# Altium PCB Fly Swatter.PcbDoc
Units mil, origin at the board's own origin, x right, y up, seen from the top; angles counter-clockwise.
Board outline 6000 x 4000 mil, 2 copper layers (Top Layer, Bottom Layer); 17 components, 10 nets, 36 pads, 0 vias.
Unrouted connection lines stored in the file: 26.
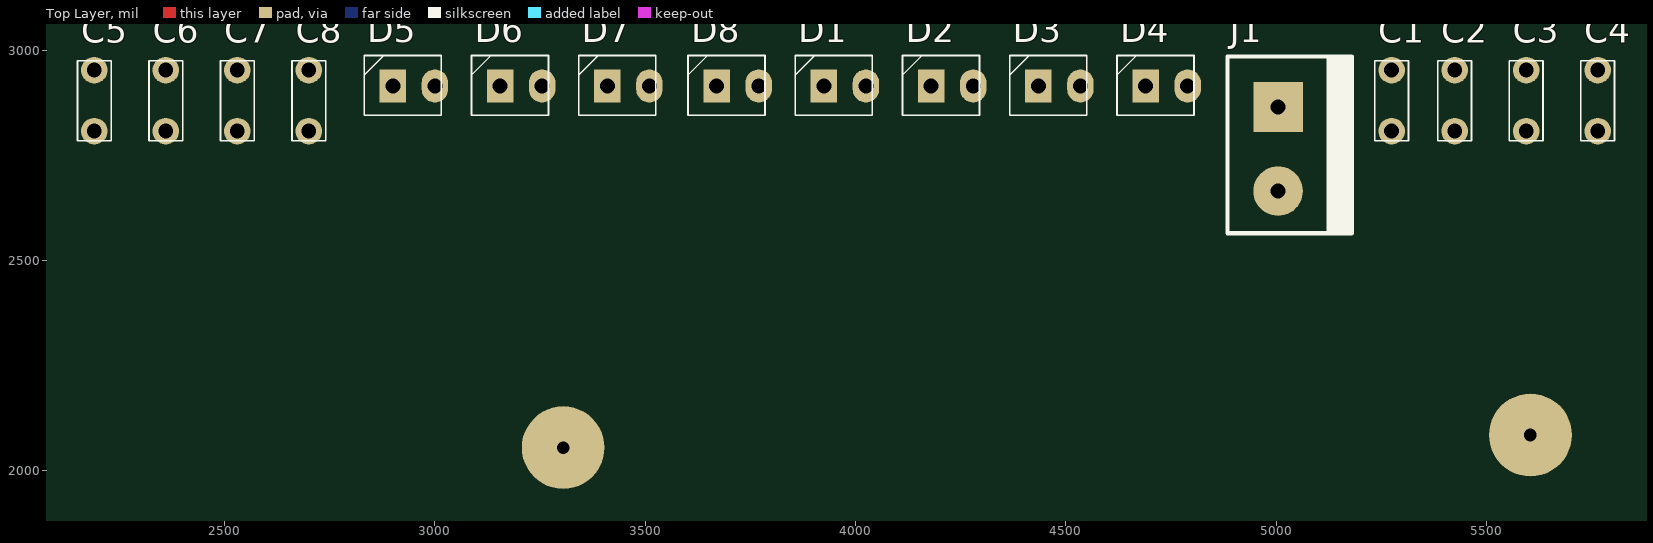
[diagram p0: Top Layer view]
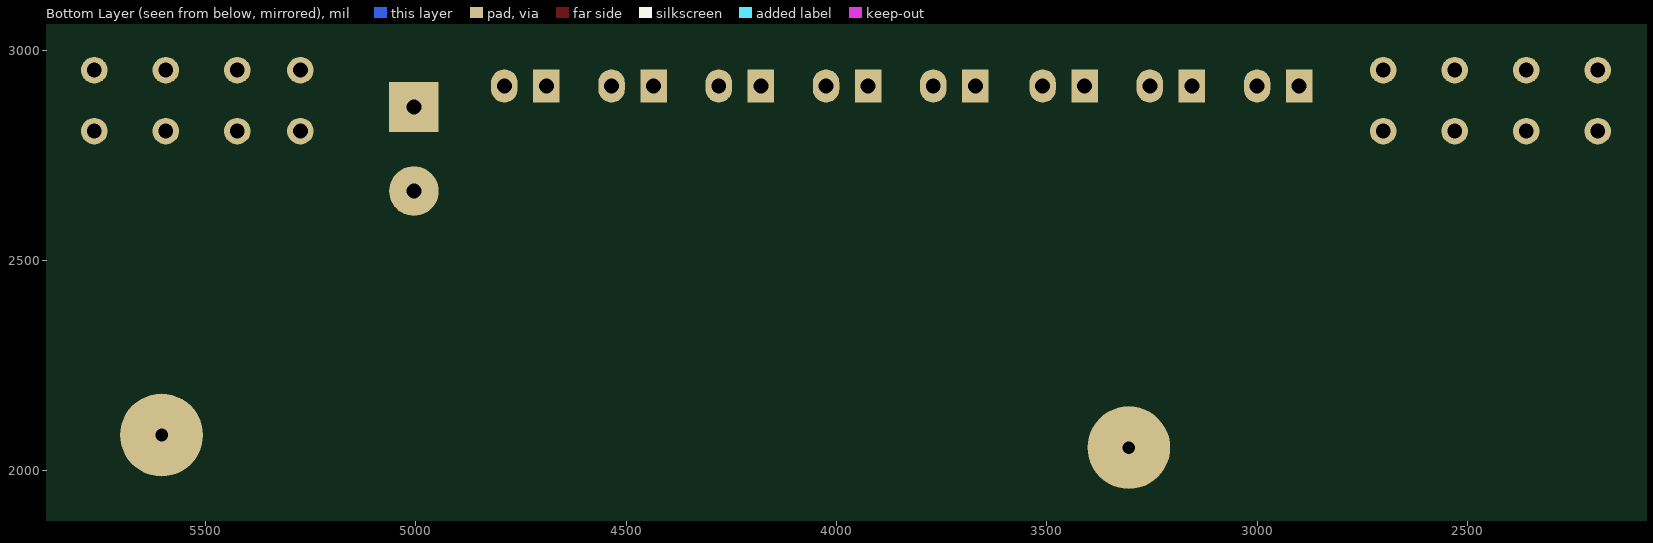
[diagram p1: Bottom Layer view, seen from below]

## Layer stack, top to bottom
Top Solder: solder mask 0.4, Solder Resist, Dk 3.5
Top Layer: signal copper 1.4
Dielectric 1: dielectric 12.6, FR-4, Dk 4.8
Bottom Layer: signal copper 1.4
Bottom Solder: solder mask 0.4, Solder Resist, Dk 3.5

## Board outline
1000,1000 7000,1000 7000,5000 1000,5000

## Design rules (kind name [scope] priority, off if disabled: settings)
Clearance [All] p1: gap=10 ignorepadtopadclearanceinfootprint=FALSE except(0: Arc-Hole Track-Hole SMDPad-Hole THPad-Hole Via-Hole Fill-Hole Poly-Hole Region-Hole Text-Hole)
PolygonConnect [All] p1: connectstyle=Relief reliefconductorwidth=10 reliefentries=4 polygonreliefangle="90 Angle" airgapwidth=10
RoutingVias [All] p1: holewidth=28 width=50 viastyle="Through Hole" minholewidth=28 minwidth=50 maxholewidth=28 maxwidth=50
SolderMaskExpansion [All] p1: expansion=4 istentingtop=FALSE
Width [All] p1: maxlimit=10 minlimit=10 preferedwidth=10
30 further rules are at their usual default settings.

## Components (designator, comment, footprint, x,y, rotation, side; value= is the part's Value field where it differs from the comment)
C1 "0.1uF 630V" "Cap Ceramic 104" 5275,2880 r90 top
C2 "0.1uF 630V" "Cap Ceramic 104" 5425,2880 r90 top
C3 "0.1uF 630V" "Cap Ceramic 104" 5595,2880 r90 top
C4 "0.1uF 630V" "Cap Ceramic 104" 5765,2880 r90 top
C5 "0.1uF 630V" "Cap Ceramic 104" 2190,2880 r90 top
C6 "0.1uF 630V" "Cap Ceramic 104" 2360,2880 r90 top
C7 "0.1uF 630V" "Cap Ceramic 104" 2530,2880 r90 top
C8 "0.1uF 630V" "Cap Ceramic 104" 2700,2880 r90 top
D1 "1N4007" "Diode 2.54mm TH V" 3975,2915 r0 top
D2 "1N4007" "Diode 2.54mm TH V" 4230,2915 r0 top
D3 "1N4007" "Diode 2.54mm TH V" 4485,2915 r0 top
D4 "1N4007" "Diode 2.54mm TH V" 4740,2915 r0 top
D5 "1N4007" "Diode 2.54mm TH V" 2950,2915 r0 top
D6 "1N4007" "Diode 2.54mm TH V" 3205,2915 r0 top
D7 "1N4007" "Diode 2.54mm TH V" 3460,2915 r0 top
D8 "1N4007" "Diode 2.54mm TH V" 3720,2915 r0 top
J1 "10 A" "Screw Terminal Block 5.08mm TH Green" 5005,2765 r0 top

## Footprints (in the part's own frame and the unit in brackets; to place one, negate y for a bottom-side part, rotate by r counter-clockwise, add the part's x,y. Pads: shape width x height; smd on the part's side, far side on the other; paste and mask are expansions set on the pad)
"Cap Ceramic 104" [mm]
  round 1.6 hole 0.9: 1(-1.841,0) 2(1.841,0)
  silkscreen extent -2.41,-1.02 2.41,1.02, body extent -2.47,-1.01 2.45,0.99, height 6.89
"Diode 2.54mm TH V" [mm] "2.54mm Vertical"
  rect 1.6x2 hole 0.9: 1(-1.27,0)
  oval 1.6x2 hole 0.9: 2(1.27,0)
  silkscreen extent -3,-1.78 1.65,1.84, body extent -3.05,-1.78 1.7,1.78, height 11.05
"Screw Terminal Block 5.08mm TH Green" [mm]
  round 3 hole 0.9: 1(0,-2.54)
  rect 3x3 hole 0.9: 2(0,2.54)
  silkscreen extent -3.05,-5.08 4.44,5.59, body extent -3.04,-5 4.56,5.6, height 10.01

## Part data
C1 C2 C3 C4 C5 C6 C7 C8: library part Ceramic_Capacitors, "Capacitor Ceramic", Capacitance=100nF, Case/Package=Dipped, Dielectric=X7R, Manufacturer=KEMET, Manufacturer Part Number=C320C104M5R5TA7301, Max Operating Temperature=125°C, Min Operating Temperature=-55°C, Package Quantity=2500, Supplier Part Number 1=399-13978-1-ND, Tolerance=20%, Voltage Rating=50V, Category="Ceramic Capacitors", ComponentLink1Description=https://datasheet.ciiva.com/5396/f3101-goldmax-5396597.pdf?src-supplier=Mouser, ComponentLink1URL=https://datasheet.ciiva.com/5396/f3101-goldmax-5396597.pdf?src-supplier=Mouser, Depth=3.18mm, Dissipation Factor=2.5%, Height=3.18mm, Lead Diameter=0.51mm, Lead Pitch=2.54mm, Lead/Base Style=Straight, Length=6.6mm, Packaging="Tape and Reel", Pricing 1="1=0.24000, 10=0.16200, 50=0.10800, 100=0.09180, 500=0.06480, 1000=0.05670 (USD)", RoHS=Yes, Stock 1=8222, Supplier 1=Digi-Key, Termination=Radial, Width=5.08mm
D1 D2 D3 D4 D5 D6 D7 D8: library part Diodes, "Diodes", Arrow Part Number=1N4007-E3/53, Manufacturer_Name=Vishay, Mouser Part Number=625-1N4007-E3/53, Arrow Price/Stock=https://www.arrow.com/en/products/1n4007-e353/vishay, Datasheet Link=http://www.vishay.com/docs/88503/1n4001.pdf, Manufacturer_Part_Number=1N4007-E3/53, Mouser Price/Stock=https://www.mouser.co.uk/ProductDetail/Vishay-General-Semiconductor/1N4007-E3-53?qs=N4vtoAxH%2FSpFgYSIWmQOdg%3D%3D
J1: library part Terminal_Block_2Pos, "Terminals 2POS", Color=Green, Current=10A, Current Rating=13.5A, Flammability Rating="UL94 V-0", Manufacturer="Phoenix Contact", Manufacturer Part Number=1729128, Max Operating Temperature=100°C, Max Supply Voltage=400V, Min Operating Temperature=-20°C, Package Quantity=50, Supplier Part Number 1=277-1247-ND, Test Voltage=4kV, Voltage=300V, Approvals=UL,CSA, Category="Terminal Blocks", ComponentLink1Description=https://datasheet.ciiva.com/823/1729128-823779.pdf?src-supplier=Digi-Key, ComponentLink1URL=https://datasheet.ciiva.com/823/1729128-823779.pdf?src-supplier=Digi-Key, ComponentLink2Description=https://datasheet.ciiva.com/15169/getdatasheetpartid-199310-15169845.pdf?src-supplier=Verical, ComponentLink2URL=https://datasheet.ciiva.com/15169/getdatasheetpartid-199310-15169845.pdf?src-supplier=Verical, ComponentLink3Description=https://datasheet.ciiva.com/16046/1729128-16046181.pdf?src-supplier=Onlinecomponents.com, ComponentLink3URL=https://datasheet.ciiva.com/16046/1729128-16046181.pdf?src-supplier=Onlinecomponents.com, ComponentLink4Description=https://datasheet.ciiva.com/14607/70054405-14607157.pdf?src-supplier=Allied+Electronics, ComponentLink4URL=https://datasheet.ciiva.com/14607/70054405-14607157.pdf?src-supplier=Allied+Electronics, ComponentLink5Description=https://datasheet.ciiva.com/29218/743664-da-01-en-printklemmenblock-mkdsn-1-5-2-5-08-29218154.pdf?src-supplier=Conrad, ComponentLink5URL=https://datasheet.ciiva.com/29218/743664-da-01-en-printklemmenblock-mkdsn-1-5-2-5-08-29218154.pdf?src-supplier=Conrad, Connector Type=Screw, Contact Material=Tin, Depth=8.1mm, Height=13.5mm, Housing Color=Green, Housing Material=Polyamide, Insulation Material=Nylon, Lead Free="Lead Free", Length=8.1mm, Max Current Rating=13.5A, Mount="Through Hole", Number of Circuits=2, Number of Contacts=2, Number of Levels=1, Number of Pins=2, Number of Poles=2, Number of Positions=2, Number of Positions Per Level=2, Number of Rows=1, Orientation=Straight, Packaging=Bulk, Pitch=5.08mm, Pricing 1="1=1.09000, 10=1.04700, 50=1.00100, 100=0.97370, 250=0.91000, 500=0.83720, 1000=0.77350, 2500=0.73710, 5000=0.69160 (USD)", Radiation Hardening=No, REACH SVHC="No SVHC", RoHS=Yes, Stock 1=9869, Supplier 1=Digi-Key, Termination=Screw, Voltage Rating=400V, Weight=0.069842oz, Width=13.5mm, Wire Gauge (Max)=26AWG, Wire Gauge (Min)=14AWG, Wire/Cable Gauge=26AWG

## Free pads (board coordinates)
  round 196.85 hole 30: 5(5605,2085) 6(3305,2055)

## Nets (pads, with @x,y where several pads share a name; then routed paths per layer and width w, separated by ;. In a path a pad name is that pad's centre, name@x,y a point inside that pad or via, vN(x,y) a via of type N, cw(c..) or ccw(c..) an arc to the next point about the centre after c; other vN are vias at no path point)
"AC I/P": C1.1 J1.1
"DC O/P 2KV": C8.2 D8.2 pad.5
GND: C5.1 D1.1 J1.2 pad.6
NetC1_2: C1.2 C2.1 D1.2 D5.1
NetC2_2: C2.2 C3.1 D2.2 D6.1
NetC3_2: C3.2 C4.1 D3.2 D7.1
NetC4_2: C4.2 D4.2 D8.1
NetC5_2: C5.2 C6.1 D2.1 D5.2
NetC6_2: C6.2 C7.1 D3.1 D6.2
NetC7_2: C7.2 C8.1 D4.1 D7.2